# Altium PCB NCS_Wireless_Bed_Unit.PcbDoc
Units mm, origin at the board's own origin, x right, y up, seen from the top; angles counter-clockwise.
Board outline 50.04 x 65.02 mm, 2 copper layers (Top Layer, Bottom Layer), stack 1.6 mm thick; 44 components, 42 nets, 176 pads, 27 vias.
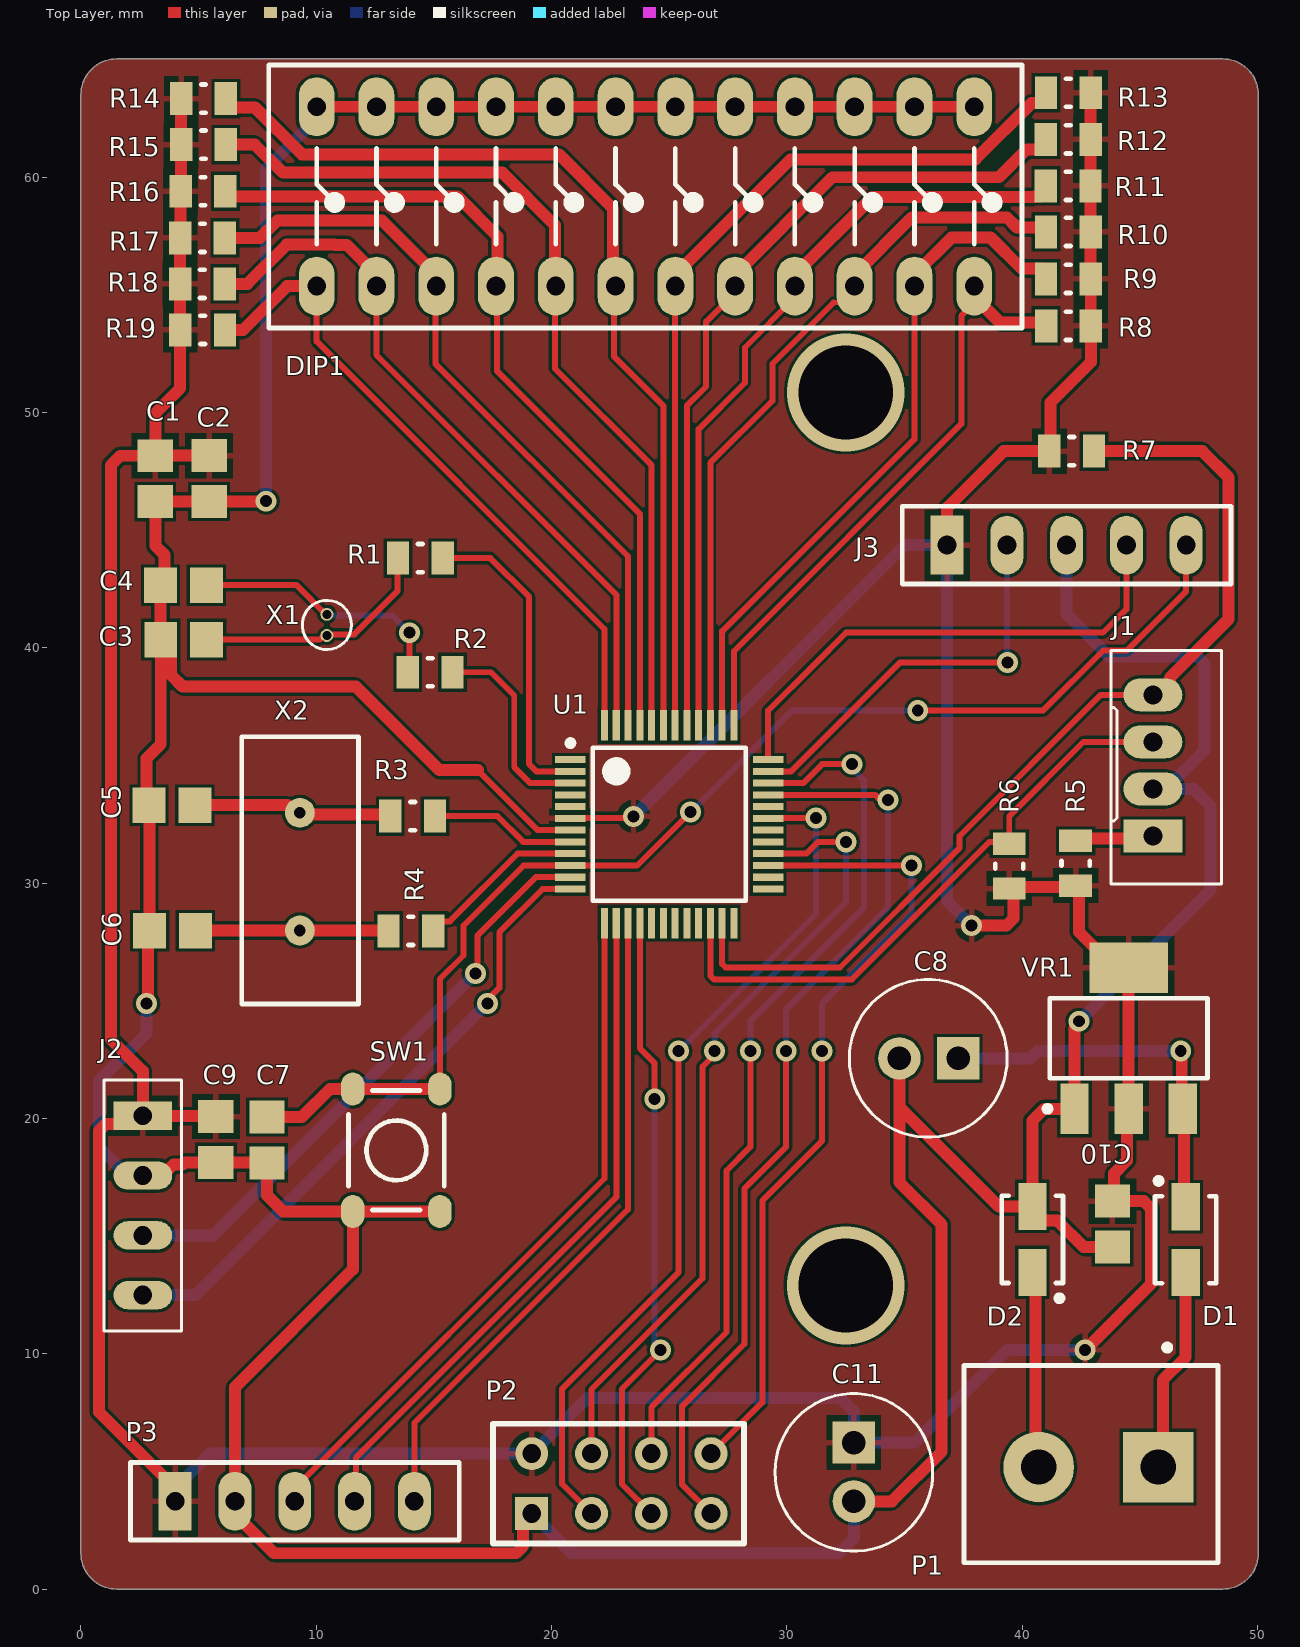
[diagram p0: Top Layer view]
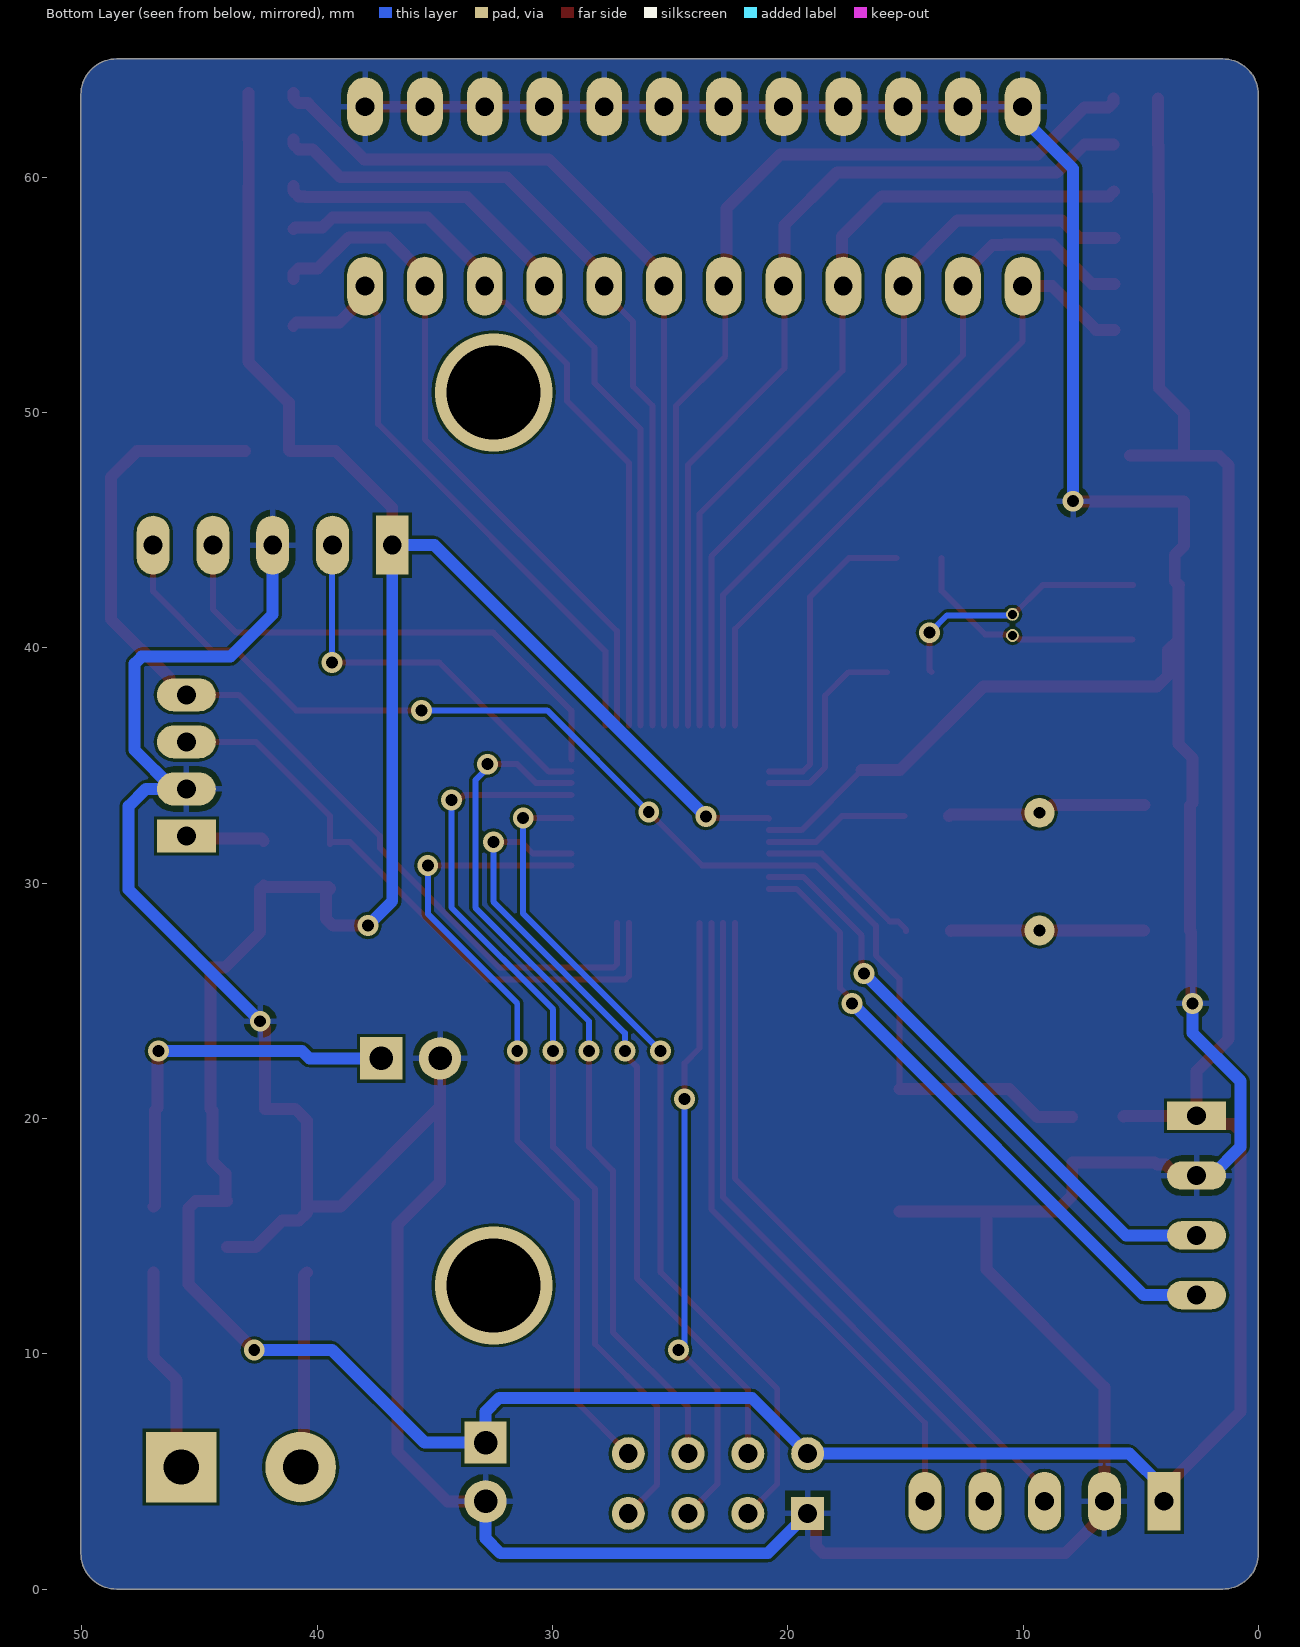
[diagram p1: Bottom Layer view, seen from below]
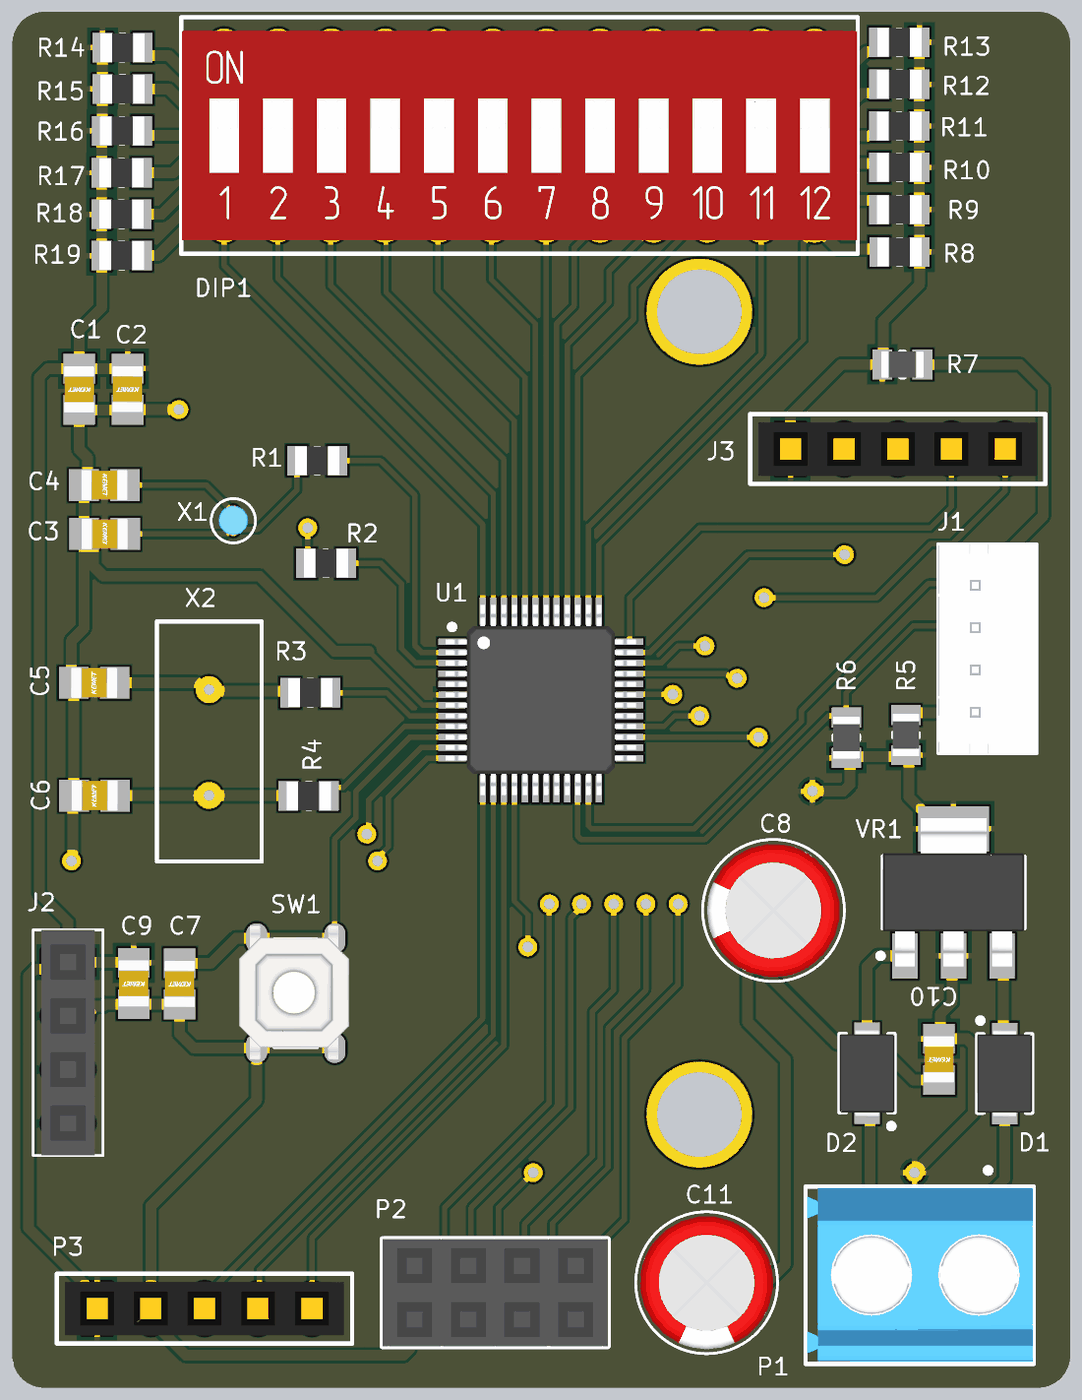
[diagram p2: 3D render of the assembled board from above, using the file's embedded part models]

## Layer stack, top to bottom
Top Solder: solder mask 0.0203, Solder Resist, Dk 3.5
Top Layer: signal copper 0.0508
Dielectric 1: dielectric 1.4986, FR-4, Dk 4.8
Bottom Layer: signal copper 0.0508
Bottom Solder: solder mask 0.0203, Solder Resist, Dk 3.5

## Board outline
1.524,0 cw(c1.524,1.524) 0,1.524 0,63.5 cw(c1.524,63.5) 1.524,65.024 48.514,65.024 cw(c48.514,63.5) 50.038,63.5 50.038,1.524 cw(c48.514,1.524) 48.514,0

## Design rules (kind name [scope] priority, off if disabled: settings)
Clearance [All] p1: gap=0.127 ignorepadtopadclearanceinfootprint=FALSE
HoleSize [All] p1: absolutevalues=TRUE maxlimit=100 minlimit=0.025 maxpercent=80.000 minpercent=20.000
MinimumSolderMaskSliver [All] p1: minsoldermaskwidth=0.127
PolygonConnect [All] p1: connectstyle=Relief reliefconductorwidth=0.254 reliefentries=4 polygonreliefangle="90 Angle" airgapwidth=0.254
RoutingVias [All] p1: holewidth=0.508 width=0.889 viastyle="Through Hole" minholewidth=0.508 minwidth=0.889 maxholewidth=100 maxwidth=100
SilkToSolderMaskClearance [IsPad] p1: minsilkscreentomaskgap=0.076 clearancetoexposedcopper=TRUE
SolderMaskExpansion [All] p1: expansion=0.102 istentingtop=FALSE
Width [All] p1: maxlimit=0.508 minlimit=0.203 preferedwidth=0.254
27 further rules are at their usual default settings.

## Classes and differential pairs
component class NCS_Wireless_Bed_Unit_Power_Supply: C8 C9 C10 C11 D1 D2 J2 P1 P2 VR1
component class NCS_Wireless_Bed_Unit_mcu: C1 C2 C3 C4 C5 C6 C7 J1 R1 R2 R3 R4 R5 R6 R7 SW1 U1 X1 X2
component class NCS_Wireless_Bed_Unit_DIP_Conn_Prog_conn: DIP1 J3 P3 R8 R9 R10 R11 R12 R13 R14 R15 R16 R17 R18 R19

## Components (designator, comment, footprint, x,y, rotation, side; value= is the part's Value field where it differs from the comment)
C1 "4.7uF" C0805C209D3HACTU_2pF 3.162,47.186 r90 top
C2 "100nF" C0805C104K3RACTU_100nF 5.448,47.191 r90 top
C3 "22pF" C0805C209D3HACTU_2pF 4.369,40.348 r180 top
C4 "22pF" C0805C209D3HACTU_2pF 4.356,42.659 r180 top
C5 "22pF" C0805C209D3HACTU_2pF 3.869,33.312 r0 top
C6 "22pF" C0805C209D3HACTU_2pF 3.892,27.978 r0 top
C7 "100nF" C0805C104K3RACTU_100nF 7.912,19.085 r90 top
C8 "100uF 25V TH" "100uF 25V TH" 37.277,22.554 r180 top
C9 "4.7uF" C0805C209D3HACTU_2pF 5.736,19.106 r90 top
C10 "104pF" C0805C471K3RACTU_470pF 43.836,15.513 r90 top
C11 "100uF 25V TH" "100uF 25V TH" 32.844,6.228 r270 top
D1 "Diode" CRS06(TE85L,Q,M)_DIODE 46.944,14.847 r90 top
D2 "Diode" CRS06(TE85L,Q,M)_DIODE 40.432,14.86 r270 top
DIP1 "12 DIP" DIP24 37.96,62.991 r270 top
J1 "1x4 Female Header" "1x4 Female Socket" 45.554,32.001 r180 top
J2 "1x4 Female Header" "1x4 Female Header" 2.631,20.112 r0 top
J3 "1x5 Female Header" "1x5 Female Header" 36.809,44.363 r90 top (schematic designator j3)
P1 "1x2 Connector" "1x2 Connector" 43.239,5.185 r270 top
P2 "2x4 header" "2x4 header" 19.157,3.216 r90 top
P3 "1x5 Female Header" "1x5 Female Header" 4.008,3.733 r90 top
R1 "0R" RC0805JR-070RL 14.423,43.812 r0 top value=0mR
R2 "0R" RC0805JR-070RL 14.838,38.96 r0 top value=0mR
R3 "0R" RC0805JR-070RL 14.096,32.845 r180 top value=0mR
R4 "0R" RC0805JR-070RL 14.019,27.969 r180 top value=0mR
R5 "1K" AC0805FR-7W1KL 42.269,30.844 r90 top value=1kR
R6 "1K" AC0805FR-7W1KL 39.449,30.72 r90 top value=1kR
R7 "1K" AC0805FR-7W1KL 42.103,48.358 r0 top value=1kR
R8 "4K7" RC0805FR-7W4K7L 41.965,53.681 r180 top
R9 "4K7" RC0805FR-7W4K7L 41.96,55.676 r180 top
R10 "4K7" RC0805FR-7W4K7L 41.96,57.676 r180 top
R11 "4K7" RC0805FR-7W4K7L 41.955,59.629 r180 top
R12 "4K7" RC0805FR-7W4K7L 41.958,61.606 r180 top
R13 "4K7" RC0805FR-7W4K7L 41.962,63.587 r180 top
R14 "4K7" RC0805FR-7W4K7L 5.21,63.337 r0 top
R15 "4K7" RC0805FR-7W4K7L 5.208,61.381 r0 top
R16 "4K7" RC0805FR-7W4K7L 5.188,59.4 r0 top
R17 "4K7" RC0805FR-7W4K7L 5.168,57.419 r0 top
R18 "4K7" RC0805FR-7W4K7L 5.165,55.463 r0 top
R19 "4K7" RC0805FR-7W4K7L 5.17,53.507 r0 top
SW1 "Push Button" "PUSH BUTTON SMD" 13.406,18.646 r90 top
U1 "STM32C031C6T6" STM32C031C6T6-48N 25,32.5 r0 top
VR1 "3v3 Voltage R" SAMS1117-33-4N 44.525,23.408 r90 top
X1 "32.768Khz" 32.768KHz 10.452,41.373 r270 top
X2 "8Mhz" "8Mhz Crystal" 9.304,27.989 r90 top

## Footprints (in the part's own frame and the unit in brackets; to place one, negate y for a bottom-side part, rotate by r counter-clockwise, add the part's x,y. Pads: shape width x height; smd on the part's side, far side on the other; paste and mask are expansions set on the pad)
"1x2 Connector" [mm]
  rect 3x3 hole 1.5: 1(0,2.54)
  round 3 hole 1.5: 2(0,-2.54)
  silkscreen extent -5.21,-5.72 4.06,5.08, body extent -4.24,-5.63 3.96,5.03, height 10
"1x4 Female Header" [mm]
  rect 2.5x1.2 hole 0.8: 1(0,0)
  oval 2.5x1.2 hole 0.8: 2(0,-2.54) 3(0,-5.08) 4(0,-7.62)
  silkscreen extent -1.65,-9.14 1.65,1.52, body extent -1.27,-9.14 1.27,1.52, height 8.51
"1x4 Female Socket" [mm]
  rect 2.5x1.4 hole 0.8: 1(0,0)
  oval 2.5x1.4 hole 0.8: 2(0,-2) 3(0,-4) 4(0,-6)
  silkscreen extent -2.92,-7.87 1.78,2.03, body extent -2.9,-7.87 1.75,2.03, height 6
"1x5 Female Header" [mm]
  rect 2.5x1.4 hole 0.8: 1(0,0)
  oval 2.5x1.4 hole 0.8: 2(0,-2.54) 3(0,-5.08) 4(0,-7.62) 5(0,-10.16)
  silkscreen extent -1.65,-12.06 1.65,1.91, body extent -1.27,-11.68 1.27,1.52, height 8.5
"2x4 header" [mm]
  rect 1.4x1.4 hole 0.8: 1(0,0)
  round 1.4 hole 0.8: 2(2.54,0) 3(0,-2.54) 4(2.54,-2.54) 5(0,-5.08) 6(2.54,-5.08) 7(0,-7.62) 8(2.54,-7.62)
  silkscreen extent -1.27,-9.02 3.81,1.65, body extent -1.27,-9.02 3.81,1.65, height 8.51
"8Mhz Crystal" [mm]
  round 1.27 hole 0.5: 1(0,0) 2(5,0)
  silkscreen extent -3.12,-2.49 8.23,2.46, body extent -3.13,-2.5 8.22,2.5, height 3.68
32.768KHz [mm]
  round 0.55 hole 0.38: 1(-0.051,0) 2(0.851,0)
  silkscreen extent -0.65,-1.04 1.45,1.05, body extent -0.32,-0.7 1.08,0.7, height 5
"100uF 25V TH" [mm]
  rect 1.8x1.8 hole 1: 1(0,0)
  round 1.8 hole 1: 2(2.5,0)
  silkscreen extent -2.08,-3.35 4.62,3.35, body extent -1.88,-3.15 4.41,3.15, height 10.89
AC0805FR-7W1KL [mm]
  rect 0.95x1.4 smd: 1(-0.95,0) 2(0.95,0)
  silkscreen extent -0.1,-0.6 0.1,0.6, body extent -1,-0.63 1,0.63, height 0.6
C0805C104K3RACTU_100nF [mm]
  rect 1.4x1.5 smd: 1(-0.975,0) 2(0.975,0)
  body extent -1.1,-0.72 1.1,0.73, height 0.88
C0805C209D3HACTU_2pF [mm] "Chip Capacitor, 2-Leads, Body 2.50x1.35mm, IPC Medium Density"
  rect 1.4x1.5 smd: 1(-0.975,0) 2(0.975,0)
  body extent -1.1,-0.72 1.1,0.73, height 0.88
C0805C471K3RACTU_470pF [mm] "Chip Capacitor, 2-Leads, Body 2.50x1.35mm, IPC Medium Density"
  rect 1.4x1.5 smd: 1(-0.975,0) 2(0.975,0)
  body extent -1.1,-0.72 1.1,0.73, height 0.88
CRS06(TE85L,Q,M)_DIODE [mm] "Molded Diode, 2-Leads, Body 3.60x2.30mm, IPC Medium Density"
  rect 2x1.2 smd: 1(-1.4,0) 2(1.4,0)
  silkscreen extent -1.85,-1.3 2.62,1.3, body extent -2.07,-1.3 2.07,1.3, height 1.5
DIP24 [mm]
  oval 2.5x1.524 hole 0.8: 1(0,0) 2(0,-2.54) 3(0,-5.08) 4(0,-7.62) 5(0,-10.16) 6(0,-12.7) 7(0,-15.24) 8(0,-17.78) 9(0,-20.32) 10(0,-22.86) 11(0,-25.4) 12(0,-27.94) 13(7.62,-27.94) 14(7.62,-25.4) 15(7.62,-22.86) 16(7.62,-20.32) 17(7.62,-17.78) 18(7.62,-15.24) 19(7.62,-12.7) 20(7.62,-10.16) 21(7.62,-7.62) 22(7.62,-5.08) 23(7.62,-2.54) 24(7.62,0)
  silkscreen extent -1.78,-29.97 9.4,2.03, body extent -1.14,-29.94 8.76,2, height 6.8
"PUSH BUTTON SMD" [mm]
  oval 1.4x1 smd: 1(-2.6,1.85) 2(-2.6,-1.85) 3(2.6,-1.85) 4(2.6,1.85)
  silkscreen extent -2.54,-2.03 2.54,2.03, body extent -3.17,-2.52 3.23,2.68, height 3
RC0805FR-7W4K7L [mm]
  rect 0.95x1.4 smd: 1(-0.95,0) 2(0.95,0)
  silkscreen extent -0.1,-0.6 0.1,0.6, body extent -1.05,-0.67 1.05,0.67, height 0.6
RC0805JR-070RL [mm]
  rect 0.95x1.4 smd: 1(-0.95,0) 2(0.95,0)
  silkscreen extent -0.1,-0.6 0.1,0.6, body extent -1.05,-0.67 1.05,0.67, height 0.6
SAMS1117-33-4N [mm] "SOT223, 4-Leads, Body 6.50x7.00mm (avg), Pitch 2.30mm, IPC Medium Density"
  rect 2.15x1.2 smd: 1(-3,2.3) 2(-3,0) 3(-3,-2.3)
  rect 2.15x3.35 smd: 4(3,0)
  silkscreen extent -3.12,-3.35 1.7,3.57, body extent -3.5,-3.35 3.5,3.35, height 1.8
STM32C031C6T6-48N [mm] "TSQFP, 48-Leads, Body 7.30x7.30mm, Pitch 0.50mm, IPC Medium Density"
  rect 1.3x0.3 smd: 1(-4.2,2.75) 2(-4.2,2.25) 3(-4.2,1.75) 4(-4.2,1.25) 5(-4.2,0.75) 6(-4.2,0.25) 7(-4.2,-0.25) 8(-4.2,-0.75) 9(-4.2,-1.25) 10(-4.2,-1.75) 11(-4.2,-2.25) 12(-4.2,-2.75) 25(4.2,-2.75) 26(4.2,-2.25) 27(4.2,-1.75) 28(4.2,-1.25) 29(4.2,-0.75) 30(4.2,-0.25) 31(4.2,0.25) 32(4.2,0.75) 33(4.2,1.25) 34(4.2,1.75) 35(4.2,2.25) 36(4.2,2.75)
  rect 0.3x1.3 smd: 13(-2.75,-4.2) 14(-2.25,-4.2) 15(-1.75,-4.2) 16(-1.25,-4.2) 17(-0.75,-4.2) 18(-0.25,-4.2) 19(0.25,-4.2) 20(0.75,-4.2) 21(1.25,-4.2) 22(1.75,-4.2) 23(2.25,-4.2) 24(2.75,-4.2) 37(2.75,4.2) 38(2.25,4.2) 39(1.75,4.2) 40(1.25,4.2) 41(0.75,4.2) 42(0.25,4.2) 43(-0.25,4.2) 44(-0.75,4.2) 45(-1.25,4.2) 46(-1.75,4.2) 47(-2.25,4.2) 48(-2.75,4.2)
  silkscreen extent -4.32,-3.25 3.25,3.57, body extent -4.5,-4.5 4.5,4.5, height 1.6

## Part data
C1 C9: library part C0805C475K3PACTU, "Multilayer Ceramic Capacitor, 4.7 uF, 25 V, ï¿½ 10%, X5R, 0805 [2012 Metric]", Case Code (Imperial)=0805, Case Code (Metric)=2012, Dielectric=X5R, Manufacturer=KEMET, Max Operating Temperature=85°C, Min Operating Temperature=-55°C, Package Quantity=2500, Supplier Part Number=80-C0805C475K3P, Tolerance=10%, Voltage Rating (DC)=25V, Case/Package=0805, Category="Ceramic Capacitors", ComponentLink1Description=https://datasheet.ciiva.com/22748/1918694-22748309.pdf?src-supplier=Element14, ComponentLink1URL=https://datasheet.ciiva.com/22748/1918694-22748309.pdf?src-supplier=Element14, ComponentLink2Description=https://datasheet.ciiva.com/18193/getdatasheetpartid-195812-18193898.pdf?src-supplier=Verical, ComponentLink2URL=https://datasheet.ciiva.com/18193/getdatasheetpartid-195812-18193898.pdf?src-supplier=Verical, ComponentLink3Description=https://datasheet.ciiva.com/18193/getdatasheetpartid-385757-18193895.pdf?src-supplier=Verical, ComponentLink3URL=https://datasheet.ciiva.com/18193/getdatasheetpartid-385757-18193895.pdf?src-supplier=Verical, Construction=Flat, Depth=1.25mm, Dissipation Factor=5%, Height=1.25mm, Length=2mm, Manufacturer Part Number=C0805C475K3PACTU, Material=4241ConductorMaterial, Mounting Technology="Surface Mount,PCB", Packaging="Tape and Reel", Pins=2NUMBER, Pricing="1=0.28, 10=0.131, 50=0.131, 100=0.086, 1000=0.071, 10000=0.045 (USD)", Radiation Hardening=No, Reach SVHC Compliant=No, RoHS=Yes, RoHS Compliant=Yes, Series="SMD Comm X5R", Stock=222120, Supplier=Mouser, Termination=SMD/SMT, Thickness=1.397mm, Width=1.2mm
C2 C7: library part C0805C104K3RACTU, "Multilayer Ceramic Capacitor, 0.1 uF, 25 V, ï¿½ 10%, X7R, 0805 [2012 Metric]", Case Code (Imperial)=0805, Case Code (Metric)=2012, Dielectric=X7R, Manufacturer=KEMET, Max Operating Temperature=125°C, Min Operating Temperature=-55°C, Package Quantity=4000, Supplier Part Number=80-C0805C104K3R, Temperature Coefficient=30ppm/°C, Tolerance=10%, Voltage Rating=25V, Case/Package=0805, Category="Ceramic Capacitors", ComponentLink1Description=https://datasheet.ciiva.com/7842/kem-c1002-x7r-smd-7842536.pdf?src-supplier=Element14, ComponentLink1URL=https://datasheet.ciiva.com/7842/kem-c1002-x7r-smd-7842536.pdf?src-supplier=Element14, ComponentLink2Description=https://datasheet.ciiva.com/7842/kem-c1002-x7r-smd-7842538.pdf?src-supplier=Element14, ComponentLink2URL=https://datasheet.ciiva.com/7842/kem-c1002-x7r-smd-7842538.pdf?src-supplier=Element14, Construction=Flat, Depth=1.25mm, Height=0.9mm, Lead Free=5697LeadFree, Lead Pitch=0.75mm, Length=2mm, Manufacturer Part Number=C0805C104K3RACTU, Material=4241ConductorMaterial, Mounting Technology="Surface Mount,PCB", Packaging="Tape and Reel", Pins=2NUMBER, Pricing="1=0.1, 10=0.03, 50=0.03, 100=0.027, 1000=0.021, 10000=0.015 (USD)", Radiation Hardening=No, Reach SVHC Compliant=4186SVHC, RoHS=Yes, RoHS Compliant=Yes, Series="SMD Comm X7R", Stock=259681, Supplier=Mouser, Termination=SMD/SMT, Thickness=889um, Voltage Rating (DC)=25V, Width=1.2mm
C3 C4 C5 C6: library part C0805C209D3HACTU, "C0805C209D3HACTU_2pF", Manufacturer=KEMET, Supplier Part Number=80-C0805C209D3HACTU, Category=Capacitors, Manufacturer Part Number=C0805C209D3HACTU, Pricing="1=0.1, 10=0.032, 50=0.032, 100=0.02, 1000=0.015, 10000=0.01 (USD)", RoHS=Yes, RoHS Compliant=Yes, Stock=22626, Supplier=Mouser
C8 C11: library part 860010473007, "WCAP-ATG8 Aluminum Electrolytic Capacitors", Leakage Current=25uA, Manufacturer="Wurth Electronics", Supplier Part Number 1=732-8630-1-ND, Voltage Rating (DC)=25V, Category="Aluminum Electrolytic Capacitors", ComponentLink1Description=https://datasheet.ciiva.com/48693/001280151-da-01-en-wcap-atg8-alu-elec-caps-860010473007-48693591.pdf?src-supplier=Conrad, ComponentLink1URL=https://datasheet.ciiva.com/48693/001280151-da-01-en-wcap-atg8-alu-elec-caps-860010473007-48693591.pdf?src-supplier=Conrad, Length=11mm, Manufacturer Part Number=860010473007, Pitch=2.5mm, Pricing 1="1=0.12, 50=0.1, 100=0.0873, 250=0.07832, 500=0.0675 (USD)", RoHS=Yes, Stock 1=10593, Supplier 1=Digikey
C10: library part C0805C471K3RACTU, "Capacitor, Ceramic, 470pF, 25VDC, 10-% Tol, 10+% Tol, X7R-TC Code, -15, 15%-TC RoHS Compliant: Yes", Manufacturer=KEMET, Supplier Part Number=80-C0805C471K3R, Category="Ceramic Capacitors", ComponentLink1Description=http://www.mouser.com/ds/2/212/KEM_C1002_X7R_SMD-1102033.pdf?src-supplier=Mouser, ComponentLink1URL=http://www.mouser.com/ds/2/212/KEM_C1002_X7R_SMD-1102033.pdf?src-supplier=Mouser, ComponentLink2Description=http://components.arrow.com/part/dataview/3447639S9184872N7429?src-supplier=Arrow+Electronics, ComponentLink2URL=http://components.arrow.com/part/dataview/3447639S9184872N7429?src-supplier=Arrow+Electronics, ComponentLink3Description=http://www.kemet.com/docfinder?Partnumber=C0805C471K3RACTU&src-supplier=Digikey, ComponentLink3URL=http://www.kemet.com/docfinder?Partnumber=C0805C471K3RACTU&src-supplier=Digikey, Manufacturer Part Number=C0805C471K3RACTU, Pricing="1=0.28, 10=0.127, 50=0.127, 100=0.076, 1000=0.064, 10000=0.05 (USD)", RoHS=Yes, Stock=4230, Supplier=Mouser
D1 D2: library part CRS06(TE85L,Q,M), "Diode Schottky 20V 1A 2-Pin S-FLAT T/R / DIODE SCHOTTKY 20V 1A SFLAT", Manufacturer=Toshiba, Supplier Part Number=CRS06QMCT-ND, Category="Rectifier Diodes", ComponentLink1Description=https://datasheet.ciiva.com/887/1764-887142.pdf?src-supplier=Digikey, ComponentLink1URL=https://datasheet.ciiva.com/887/1764-887142.pdf?src-supplier=Digikey, ComponentLink2Description=https://datasheet.ciiva.com/26868/getdatasheetpartid-564949-26868437.pdf?src-supplier=Verical, ComponentLink2URL=https://datasheet.ciiva.com/26868/getdatasheetpartid-564949-26868437.pdf?src-supplier=Verical, ComponentLink3Description=https://datasheet.ciiva.com/4715/1638-15026-4715604.pdf?src-supplier=Mouser, ComponentLink3URL=https://datasheet.ciiva.com/4715/1638-15026-4715604.pdf?src-supplier=Mouser, ComponentLink4Description=https://datasheet.ciiva.com/8290/crs06-datasheet-en-20131101-8290709.pdf?src-supplier=Avnet, ComponentLink4URL=https://datasheet.ciiva.com/8290/crs06-datasheet-en-20131101-8290709.pdf?src-supplier=Avnet, ComponentLink5Description=https://datasheet.ciiva.com/916/dst-crs06-tde-en-1638-916705.pdf?src-supplier=Digikey, ComponentLink5URL=https://datasheet.ciiva.com/916/dst-crs06-tde-en-1638-916705.pdf?src-supplier=Digikey, Manufacturer Part Number=CRS06(TE85L,Q,M), Pricing="1=0.41, 10=0.32, 100=0.2283, 500=0.17242, 1000=0.15438 (USD)", RoHS=Yes, Stock=4733, Supplier=Digikey
DIP1: library part "12 Way 2.54MM DIP switch - SUNROM"
J1: library part SWR201-NRTN-S04-SA-WH, "Wafer: , Tin Overall, Straight w/ Type 1 Kinked End Pins, 1x4 Pos (4 pins)", Flammability Rating="UL94 V-0", Insulation Color=White, Manufacturer=Sullins, Max Operating Temperature=85°C, Min Operating Temperature=-25°C, Supplier Part Number 1=S9457-ND, Voltage Rating=125V, Category=Connectors, ComponentLink1Description=https://datasheet.ciiva.com/740/swr201-nrtn-sxx-sa-wh-740672.pdf?src-supplier=Digikey, ComponentLink1URL=https://datasheet.ciiva.com/740/swr201-nrtn-sxx-sa-wh-740672.pdf?src-supplier=Digikey, ComponentLink2Description=https://datasheet.ciiva.com/16492/swr201-nrtn-sa-wh-16492299.pdf?src-supplier=Future+Electronics, ComponentLink2URL=https://datasheet.ciiva.com/16492/swr201-nrtn-sa-wh-16492299.pdf?src-supplier=Future+Electronics, Connector Type=Header, Contact Finish - Mating=TIN, Contact Material=Brass, Contact Shape=Square, Contact Type="Male Pin", Fastening Type=Detent, Insulation Material=Nylon, Lead Free="Lead Free", Manufacturer Part Number=SWR201-NRTN-S04-SA-WH, Mount="Through Hole", Number of Positions=4, Number of Rows=1, Packaging=Bulk, Pricing 1="1=0.14, 10=0.118, 100=0.1004, 500=0.08962, 2000=0.08125, 6000=0.07518, 10000=0.07252 (USD)", RoHS=Yes, RoHS Compliant=Yes, Series=SWR201, Stock 1=6908, Supplier 1=Digikey, Termination="Kinked Pin"
J2: library part PPPC041LFBN-RC, "Female, 4 C, Straight, .100\"CC; 3.20mm Tail, No Mounting; PBT, Phos. Bronze, 105 C", Manufacturer=Sullins, Supplier Part Number 1=S7037-ND, Category=Connectors, ComponentLink1Description=https://media.digikey.com/pdf/Data%20Sheets/Sullins%20PDFs/Female_Headers.100_DS.pdf?src-supplier=Digikey, ComponentLink1URL=https://media.digikey.com/pdf/Data%20Sheets/Sullins%20PDFs/Female_Headers.100_DS.pdf?src-supplier=Digikey, ComponentLink2Description=http://www.sullinscorp.com/catalogs/78_Page80-81_HEADER_.100_2.54mm_FEMALE.pdf?src-supplier=Future+Electronics, ComponentLink2URL=http://www.sullinscorp.com/catalogs/78_Page80-81_HEADER_.100_2.54mm_FEMALE.pdf?src-supplier=Future+Electronics, ComponentLink3Description=https://datasheet.octopart.com/PPPC041LFBN-RC-Sullins-datasheet-41308905.pdf?src-supplier=Future+Electronics, ComponentLink3URL=https://datasheet.octopart.com/PPPC041LFBN-RC-Sullins-datasheet-41308905.pdf?src-supplier=Future+Electronics, Contact Material=150ConductorMaterial, Height=8.5mm, Housing Material=4239ConductorMaterial, Lead Free=5697LeadFree, Length=10.7mm, Manufacturer Part Number=PPPC041LFBN-RC, Pricing 1="1=0.42, 10=0.338, 100=0.2755, 500=0.23884, 1000=0.2246, 5000=0.2106 (USD)", RoHS=Yes, Stock 1=15423, Supplier 1=Digikey, Width=2.5mm
J3 P3: library part M20-9990546, "2.54mm (0.1) Pitch SIL Vertical PC Tail Pin Header, 6.1mm mating pin height, tin, 5 contacts\"", Case/Package=SIL, Current Rating=3A, Flammability Rating="UL94 V-0", Insulation Color=Black, Insulation Resistance=10GR, Manufacturer=Harwin, Max Operating Temperature=105°C, Min Operating Temperature=-40°C, Package Quantity=1000, Supplier Part Number=952-2268-ND, Voltage Rating (DC)=750V, Category="Headers and Wire Housings", ComponentLink1Description=https://datasheet.ciiva.com/11749/0900766b80da602d-11749062.pdf?src-supplier=Rs, ComponentLink1URL=https://datasheet.ciiva.com/11749/0900766b80da602d-11749062.pdf?src-supplier=Rs, ComponentLink2Description=https://datasheet.ciiva.com/6833/m20-999-6833320.pdf?src-supplier=Digikey, ComponentLink2URL=https://datasheet.ciiva.com/6833/m20-999-6833320.pdf?src-supplier=Digikey, ComponentLink3Description=https://datasheet.ciiva.com/8046/315376-8046940.pdf?src-supplier=Element14, ComponentLink3URL=https://datasheet.ciiva.com/8046/315376-8046940.pdf?src-supplier=Element14, Contact Finish - Mating=TIN, Contact Material=Brass,Bronze, Contact Plating=Tin, Contact Shape=Square, Contact Type="Male Pin", Fastening Type=Pull, Gender=Male, Insulation Material=Nylon, Manufacturer Part Number=M20-9990546, Mated Stacking Heights=16.54mm, Mounting Technology="Through Hole", Number of Contacts=5, Number of Positions=5, Number of Rows=1, Orientation=Straight, Packaging=Bulk, Pitch=2.54mm, Pricing="1=0.2, 10=0.163, 100=0.1329, 500=0.11516, 1000=0.10828, 5000=0.09388, 10000=0.08828 (USD)", Reach SVHC Compliant=No, RoHS=Yes, RoHS Compliant=Yes, Series=M20, Stock=16218, Supplier=Digikey, Termination=Solder
P1: library part TB006-508-02BE, "2~24 Poles, Screw Type, Horizontal, 5.08 Pitch, 26~14 (AWG), Terminal Block Connector", Manufacturer=CUI, Supplier Part Number=9117522, Manufacturer Part Number=TB006-508-02BE, RoHS=Yes, Supplier="Future Electronics"
P2: library part PPTC042LFBN-RC, "Header Connector, Pcb Mnt, 8 Contacts, Skt, 0.1 Pitch, Pc Tail Terminal, Locking", Current Rating=3A, Manufacturer=Sullins, Supplier Part Number=S7072-ND, Category="Headers and Wire Housings", ComponentLink1Description=https://media.digikey.com/pdf/Data%20Sheets/Sullins%20PDFs/Female_Headers.100_DS.pdf?src-supplier=Digikey, ComponentLink1URL=https://media.digikey.com/pdf/Data%20Sheets/Sullins%20PDFs/Female_Headers.100_DS.pdf?src-supplier=Digikey, ComponentLink2Description=https://datasheet.octopart.com/PPTC042LFBN-RC-Sullins-datasheet-83216130.pdf?src-supplier=Future+Electronics, ComponentLink2URL=https://datasheet.octopart.com/PPTC042LFBN-RC-Sullins-datasheet-83216130.pdf?src-supplier=Future+Electronics, Contact Material=150,153,154ConductorMaterial, Height=8.5mm, Housing Material=4239ConductorMaterial, Lead Free=5697LeadFree, Length=10.7mm, Manufacturer Part Number=PPTC042LFBN-RC, Number of Contacts=8NUMBER, Pricing="1=0.63, 10=0.514, 80=0.427, 440=0.36705, 1000=0.34128, 5000=0.3328 (USD)", RoHS=Yes, Stock=8036, Supplier=Digikey, Width=5mm
R1 R2 R3 R4: library part RC0805JR-070RL, "GENERAL PURPOSE CHIP RESISTOR Metal Glaze/thick Film, 0.125W, 0ohm, Surface Mount, 0805", Case Code (Imperial)=0805, Case Code (Metric)=2012, Manufacturer=Yageo, Max Operating Temperature=155°C, Max Power Dissipation=125mW, Min Operating Temperature=-55°C, Resistance Tolerance=5%, Resistor Type="Thick Film", Supplier Part Number=2506467, Temperature Coefficient=200ppm/°C, Voltage Rating=150V, Case/Package=0805, Category="Chip SMD Resistors", ComponentLink1Description=https://datasheet.ciiva.com/11819/0900766b8106beab-11819430.pdf?src-supplier=Rs, ComponentLink1URL=https://datasheet.ciiva.com/11819/0900766b8106beab-11819430.pdf?src-supplier=Rs, ComponentLink2Description=https://datasheet.ciiva.com/7941/1738694-7941861.pdf?src-supplier=Element14, ComponentLink2URL=https://datasheet.ciiva.com/7941/1738694-7941861.pdf?src-supplier=Element14, ComponentLink3Description=https://datasheet.ciiva.com/7941/1738694-7941862.pdf?src-supplier=Element14, ComponentLink3URL=https://datasheet.ciiva.com/7941/1738694-7941862.pdf?src-supplier=Element14, ComponentLink4Description=https://datasheet.ciiva.com/7941/1738694-7941863.pdf?src-supplier=Element14, ComponentLink4URL=https://datasheet.ciiva.com/7941/1738694-7941863.pdf?src-supplier=Element14, ComponentLink5Description=https://datasheet.ciiva.com/15190/getdatasheetpartid-330685-15190028.pdf?src-supplier=Verical, ComponentLink5URL=https://datasheet.ciiva.com/15190/getdatasheetpartid-330685-15190028.pdf?src-supplier=Verical, Construction=Rectangular, Contact Plating=Tin,Matte, Depth=1.25mm, Features="Moisture Resistant", Height=0.5mm, Lead Free=5697LeadFree, Length=2mm, Manufacturer Part Number=RC0805JR-070RL, Military Standard=Not, Number of Terminations=2, Packaging="Tape and Reel", Pins=2, Power Rating=125mW, Pricing="5000=0.0014, 25000=0.0013, 100000=0.0013, 125000=0.0013, 250000=0.0012, 500000=0.0012, 625000=0.0012, 1250000=0.0012 (USD)", Reach SVHC Compliant=Unknown, RoHS=Yes, RoHS Compliant=Yes, Series=RC, Stock=435000, Supplier="Future Electronics", Technology="THICK FILM", Termination=SMD/SMT, Tolerance=5%, Voltage Rating (DC)=150V, Width=1.25mm
R5 R6 R7: library part AC0805FR-7W1KL, "SMD Chip Resistor, 1 kOhm, ± 1%, 250 mW, 0805 [2012 Metric], Thick Film, General Purpose", Case/Package=339Case, Manufacturer=Yageo, Supplier Part Number=13-AC0805FR-7W1KLCT-ND, Category="Chip SMD Resistors", Manufacturer Part Number=AC0805FR-7W1KL, Packaging=10Packaging, Pricing="1=0.1, 10=0.027, 50=0.0204, 100=0.0143, 500=0.01378, 1000=0.01326 (USD)", RoHS=Yes, RoHS Compliant=Yes, Stock=36869, Supplier=Digikey
R8 R9 R10 R11 R12 R13 R14 R15 R16 R17 R18 R19: library part RC0805FR-7W4K7L, "SMD Chip Resistor, 4.7 kOhm, ± 1%, 250 mW, 0805 [2012 Metric], Thick Film, General Purpose", Manufacturer=Yageo, Supplier Part Number=13-RC0805FR-7W4K7LCT-ND, Category="Chip SMD Resistors", Manufacturer Part Number=RC0805FR-7W4K7L, Pricing="1=0.17, 10=0.06, 50=0.0484, 100=0.0367, 500=0.03468, 1000=0.03264 (USD)", RoHS=Yes, RoHS Compliant=Yes, Stock=8233, Supplier=Digikey
SW1: library part "Tactile Switch SMD 4P 5.2x5.2x1.5mm - EVELTA"
U1: "RISC Microcontroller, 32-Bit, FLASH, CORTEX-M4F CPU, 180MHz, CMOS, PBGA216", Manufacturer=STMicroelectronics, Supplier Part Number 1=511-STM32C031C6T6, Category=Microcontrollers, ComponentLink1Description=https://datasheet.octopart.com/STM32C031C6T6-STMicroelectronics-datasheet-168218616.pdf?src-supplier=TME, ComponentLink1URL=https://datasheet.octopart.com/STM32C031C6T6-STMicroelectronics-datasheet-168218616.pdf?src-supplier=TME, Manufacturer Part Number=STM32C031C6T6, Pricing 1="1=2.39, 10=1.53, 50=1.36, 100=1.12, 1000=0.78, 10000=0.629 (USD)", RoHS=No, Stock 1=900, Supplier 1=Mouser
VR1: library part AMS1117-33-3.3V
X1: library part "32.768 Khz RTC Crystal T38-SUNROM"
X2: library part "8 Mhz Crystal HC-49US-SUNROM"

## Via types
v1: diameter 0.889, hole 0.508, Top Layer to Bottom Layer, 25 vias
v2: diameter 5, hole 4, Top Layer to Bottom Layer, 2 vias

## Nets (pads, with @x,y where several pads share a name; then routed paths per layer and width w, separated by ;. In a path a pad name is that pad's centre, name@x,y a point inside that pad or via, vN(x,y) a via of type N, cw(c..) or ccw(c..) an arc to the next point about the centre after c; other vN are vias at no path point)
+9V: D1.1 P1.1 | length 8.7
  Top Layer w0.508: P1.1 45.974,5.38 45.974,8.89 46.944,9.86 D1.1
AGND: D2.2 P1.2 | length 8.4
  Top Layer w0.508: D2.2 40.565,13.326 40.565,5.319 P1.2
GND: C1.1 C2.1 C3.2 C4.2 C5.1 C6.1 C7.1 C8.2 C9.1 C10.1 C11.2 D2.1 DIP1.1 DIP1.2 DIP1.3 DIP1.4 DIP1.5 DIP1.6 DIP1.7 DIP1.8 DIP1.9 DIP1.10 DIP1.11 DIP1.12 J1.2 J2.2 J3.3 P2.1 P3.2 SW1.1 SW1.2 U1.7 VR1.1 | length 235.9
  Top Layer w0.254: 16.866,34.798 19.414,32.25 U1.7
  Top Layer w0.508: J2.2 3.468,17.572 3.93,18.034 4.318,18.034 4.415,18.131 C9.1 5.746,18.121 7.902,18.121 C7.1 7.912,16.726 8.592,16.046 SW1.1 ; v1(2.794,24.892) 2.856,24.954 2.856,27.917 C6.1 2.906,27.99 2.906,33.301 C5.1 2.794,33.413 2.794,35.306 3.394,35.906 C3.2 ; v1(7.874,46.228) 7.868,46.222 5.454,46.222 C2.1 5.445,46.213 3.165,46.213 C1.1 3.162,44.336 3.556,43.942 3.556,42.834 C4.2 3.388,42.653 3.388,40.354 C3.2 ; DIP1.12 DIP1.11 DIP1.10 DIP1.9 DIP1.8 DIP1.7 DIP1.6 DIP1.5 DIP1.4 DIP1.3 DIP1.2 DIP1.1 ; SW1.2 SW1.1 ; 16.866,34.798 15.24,34.798 11.684,38.354 4.318,38.354 3.836,38.836 3.836,39.905 C3.2 ; P2.1 18.796,2.855 18.796,1.822 18.498,1.524 8.207,1.524 6.548,3.183 P3.2 6.548,8.58 11.556,13.588 SW1.1 ; C11.2 34.462,3.728 36.576,5.842 36.576,15.494 34.777,17.293 34.777,20.486 ; C8.2 34.777,20.486 ; v1@42.225,23.834 VR1.1 40.938,20.408 40.432,19.902 D2.1 ; C10.1 42.612,14.538 41.492,15.658 40.778,15.658 40.432,16.004 D2.1 ; 34.777,20.486 39.003,16.26 D2.1
  Bottom Layer w0.508: J2.2 1.981,17.572 0.762,18.79 0.762,21.59 2.794,23.622 v1(2.794,24.892) ; v1(7.874,46.228) 7.874,60.357 10.02,62.503 DIP1.12 ; P2.1 20.849,1.524 32.214,1.524 32.844,2.153 C11.2 ; J3.3 41.889,41.423 43.688,39.624 47.454,39.624 47.752,39.326 47.752,35.649 J1.2@46.104,34.001 ; v1(42.418,24.13) 48.006,29.718 48.006,33.274 47.279,34.001 J1.2@46.104,34.001 ; J1.2 J1.2@46.104,34.001
NetC3_1: C3.1 R1.1 X1.2 | length 10.4
  Top Layer w0.254: C3.1 10.147,40.348 10.372,40.573 10.452,40.573 11.617,40.573 13.462,42.418 13.462,43.8 R1.1
NetC4_1: C4.1 R2.1 X1.1 | length 11.2
  Top Layer w0.254: C4.1 9.166,42.659 X1.1@10.452,41.373 ; R2.1 13.97,39.042 v1(13.97,40.64)
  Bottom Layer w0.254: X1.1@10.452,41.373 13.237,41.373 v1(13.97,40.64)
NetC5_2: C5.2 R3.2 X2.2 | length 8.5
  Top Layer w0.508: C5.2 8.774,33.312 9.098,32.989 X2.2 9.376,32.917 13.074,32.917 R3.2
NetC6_2: C6.2 R4.2 X2.1 | length 8.2
  Top Layer w0.508: C6.2 4.872,27.983 9.299,27.983 X2.1 9.314,27.979 13.059,27.979 R4.2
NetC7_2: C7.2 J3.5 SW1.3 SW1.4 U1.10 | length 53.8
  Top Layer w0.254: SW1.3 15.256,25.924 16.256,26.924 16.256,28.194 18.812,30.75 U1.10 23.638,30.75 v1(25.908,33.02) ; v1(35.56,37.338) 40.894,37.338 43.434,39.878 44.45,39.878 46.969,42.397 J3.5
  Top Layer w0.508: C7.2 9.392,20.06 10.578,21.246 SW1.4 SW1.3
  Bottom Layer w0.254: v1(25.908,33.02) 30.226,37.338 v1(35.56,37.338)
NetC8_1: C8.1 D1.2 VR1.3 | length 16.3
  Top Layer w0.508: v1(46.736,22.86) 46.78,22.816 46.78,20.452 VR1.3 46.885,20.348 46.885,16.307 D1.2
  Bottom Layer w0.508: C8.1 40.334,22.554 40.64,22.86 v1(46.736,22.86)
NetDIP1_13: DIP1.13 R19.2 U1.48 | length 28.4
  Top Layer w0.254: DIP1.13 10.02,53.023 22.244,40.798 U1.48@22.244,36.7
  Top Layer w0.508: R19.2 6.898,53.507 8.762,55.371 DIP1.13
NetDIP1_14: DIP1.14 R18.2 U1.47 | length 31
  Top Layer w0.254: DIP1.14 12.56,52.439 22.75,42.249 U1.47
  Top Layer w0.508: R18.2 7.076,55.463 8.742,57.129 10.802,57.129 10.806,57.125 11.294,57.125 12.56,55.859 DIP1.14
NetDIP1_15: DIP1.15 R17.2 U1.46 | length 32.8
  Top Layer w0.203: DIP1.15@15.062,55.333 DIP1.15
  Top Layer w0.254: DIP1.15@15.062,55.333 15.062,52.07 23.25,43.882 U1.46
  Top Layer w0.508: R17.2 7.609,57.419 8.357,58.166 12.792,58.166 15.1,55.859 DIP1.15
NetDIP1_16: DIP1.16 R16.2 U1.45 | length 35.7
  Top Layer w0.203: DIP1.16@17.602,55.408 DIP1.16 DIP1.16@17.678,55.332
  Top Layer w0.254: DIP1.16@17.678,55.332 17.678,51.765 23.75,45.694 U1.45
  Top Layer w0.508: R16.2 6.356,59.182 16.002,59.182 17.697,57.487 17.697,55.502 DIP1.16@17.602,55.408
NetDIP1_17: DIP1.17 R15.2 U1.44 | length 38.4
  Top Layer w0.254: DIP1.17@20.142,55.333 20.142,51.867 24.25,47.759 U1.44
  Top Layer w0.508: R15.2 7.395,61.381 8.578,60.198 17.907,60.198 20.142,57.963 DIP1.17@20.142,55.333
NetDIP1_18: DIP1.18 R14.2 U1.43 | length 41.3
  Top Layer w0.254: DIP1.18@22.657,55.308 22.657,52.375 24.75,50.282 U1.43
  Top Layer w0.508: R14.2 6.16,63.182 6.381,62.961 7.397,62.961 9.398,60.96 20.32,60.96 22.606,58.674 22.606,55.359 DIP1.18@22.657,55.308
NetDIP1_19: DIP1.19 R13.2 U1.42 | length 38.2
  Top Layer w0.203: DIP1.19@25.25,55.361 DIP1.19
  Top Layer w0.254: U1.42 DIP1.19@25.25,55.361
  Top Layer w0.508: DIP1.19 25.26,55.859 30.158,60.757 38.01,60.757 40.394,63.141 40.791,63.141 41.012,63.362 R13.2
NetDIP1_20: DIP1.20 R12.2 U1.41 | length 35.7
  Top Layer w0.203: DIP1.20@27.8,55.09 DIP1.20
  Top Layer w0.254: U1.41 25.75,50.286 26.568,51.105 26.568,53.859 DIP1.20@27.8,55.09
  Top Layer w0.508: DIP1.20 27.8,55.859 31.936,59.995 39.014,59.995 40.198,61.179 40.787,61.179 41.008,61.4 R12.2
NetDIP1_21: DIP1.21 R11.2 U1.40 | length 33.2
  Top Layer w0.203: DIP1.21@30.34,54.883 DIP1.21
  Top Layer w0.254: U1.40 26.25,49.288 28.219,51.257 28.219,52.762 DIP1.21@30.34,54.883
  Top Layer w0.508: DIP1.21 30.34,55.859 33.638,59.157 40.486,59.157 40.513,59.183 40.784,59.183 41.005,59.404 R11.2
NetDIP1_22: DIP1.22 R10.2 U1.39 | length 31.2
  Top Layer w0.203: 31.989,54.671 32.269,54.671 32.88,55.281 DIP1.22
  Top Layer w0.254: U1.39 26.75,47.857 29.388,50.495 29.388,52.07 31.989,54.671
  Top Layer w0.508: DIP1.22 32.88,55.859 35.314,58.293 39.345,58.293 39.776,57.861 40.937,57.861 R10.2@41.01,57.789
NetDIP1_23: DIP1.23 R9.2 U1.38 | length 29.7
  Top Layer w0.203: 27.25,40.716 27.28,40.716
  Top Layer w0.254: U1.38 27.25,40.716 ; 27.28,40.716 35.42,48.856 DIP1.23
  Top Layer w0.508: DIP1.23 35.42,55.859 36.998,57.437 38.651,57.437 39.966,56.122 40.789,56.122 41.01,55.901 R9.2
NetDIP1_24: DIP1.24 R8.2 U1.37 | length 26.5
  Top Layer w0.203: DIP1.24@37.96,54.649 DIP1.24@37.96,54.918
  Top Layer w0.254: U1.37 27.75,39.853 37.414,49.517 37.414,54.103 DIP1.24@37.96,54.649
  Top Layer w0.508: DIP1.24 37.96,54.918 39.055,53.823 40.874,53.823 R8.2
NetJ1_1: J1.1 R5.2 | length 3.4
  Top Layer w0.508: R5.2 42.372,31.897 45.45,31.897 J1.1
NetJ1_3: J1.3 R6.2 U1.22 | length 26
  Top Layer w0.254: U1.22 26.75,26.057 26.899,25.908 32.766,25.908 38.608,31.75 39.37,31.75 R6.2 39.449,32.845 42.605,36.001 J1.3
NetJ1_4: J1.4 R7.2 U1.23 | length 42.1
  Top Layer w0.254: U1.23 27.25,26.565 27.399,26.416 32.258,26.416 37.338,31.496 37.338,32.004 43.335,38.001 J1.4
  Top Layer w0.508: R7.2 47.654,48.358 48.768,47.244 48.768,41.215 46.275,38.721 46.275,38.413 45.863,38.001 J1.4
NetJ2_3: J2.3 U1.11 | length 25.4
  Top Layer w0.254: v1(16.764,26.162) 16.858,26.256 16.858,27.78 19.328,30.25 U1.11
  Bottom Layer w0.508: J2.3 5.634,15.032 v1(16.764,26.162)
NetJ2_4: J2.4 U1.12 | length 26.8
  Top Layer w0.254: v1(17.272,24.892) 17.272,25.043 17.78,25.551 17.78,27.909 19.621,29.75 U1.12
  Bottom Layer w0.508: J2.4 4.872,12.492 v1(17.272,24.892)
NetJ3_2: J3.2 U1.35 | length 17.1
  Top Layer w0.254: U1.35 30.178,34.75 34.798,39.37 v1(39.37,39.37)
  Bottom Layer w0.254: J3.2 39.359,44.352 39.359,39.381 v1(39.37,39.37)
NetJ3_4: J3.4 U1.36 | length 21.8
  Top Layer w0.254: U1.36 29.2,37.328 31.113,39.241 32.512,40.64 43.434,40.64 44.429,41.635 J3.4
NetP2_3: P2.3 U1.31 | length 36.6
  Top Layer w0.254: P2.3 20.447,4.466 20.447,8.509 25.4,13.462 v1(25.4,22.86) ; U1.31 29.216,32.766 v1(31.242,32.766)
  Bottom Layer w0.254: v1(25.4,22.86) 31.242,28.702 v1(31.242,32.766)
NetP2_4: P2.4 U1.28 | length 34
  Top Layer w0.254: P2.4 21.697,8.489 26.416,13.208 26.416,22.201 26.924,22.709 v1(26.924,22.86) ; U1.28 30.829,31.25 31.329,31.75 v1(32.512,31.75)
  Bottom Layer w0.254: v1(26.924,22.86) 26.924,23.622 32.512,29.21 v1(32.512,31.75)
NetP2_5: P2.5 U1.16 | length 26.7
  Top Layer w0.254: U1.16 23.75,22.986 24.384,22.352 v1(24.384,20.828) ; P2.5 22.991,4.462 22.991,8.513 v1(24.638,10.16)
  Bottom Layer w0.254: v1(24.384,20.828) 24.384,10.414 v1(24.638,10.16)
NetP2_6: P2.6 U1.34 | length 37.1
  Top Layer w0.254: P2.6 24.237,7.727 27.432,10.922 27.432,17.78 28.448,18.796 v1(28.448,22.86) ; U1.34 30.694,34.25 31.496,35.052 v1(32.766,35.052)
  Bottom Layer w0.254: v1(28.448,22.86) 28.448,24.13 33.274,28.956 33.274,34.372 32.766,34.88 v1(32.766,35.052)
NetP2_7: P2.7 U1.33 | length 39.6
  Top Layer w0.254: P2.7 25.552,4.44 25.552,7.772 28.194,10.414 28.194,17.018 29.972,18.796 v1(29.972,22.86) ; U1.33 33.75,33.75 33.972,33.528 v1(34.29,33.528)
  Bottom Layer w0.254: v1(29.972,22.86) 29.972,24.638 34.29,28.956 v1(34.29,33.528)
NetP2_8: P2.8 U1.27 | length 34.6
  Top Layer w0.254: P2.8 28.956,7.935 28.956,16.51 31.496,19.05 v1(31.496,22.86) ; U1.27 35.29,30.75 v1(35.298,30.742)
  Bottom Layer w0.254: v1(31.496,22.86) 31.496,24.892 35.298,28.694 v1(35.298,30.742)
NetP3_3: P3.3 U1.13 | length 30
  Top Layer w0.254: P3.3 9.088,4.283 22.25,17.446 U1.13
NetP3_4: P3.4 U1.14 | length 29.2
  Top Layer w0.254: P3.4 11.684,3.79 11.684,5.588 22.75,16.654 U1.14
NetP3_5: P3.5 U1.15 | length 28.3
  Top Layer w0.254: P3.5 14.168,7.056 23.25,16.138 U1.15
NetR1_2: R1.2 U1.2 | length 13.3
  Top Layer w0.254: R1.2 17.402,43.812 19.05,42.164 19.05,35.052 19.352,34.75 U1.2
NetR2_2: R2.2 U1.3 | length 8.7
  Top Layer w0.254: R2.2 17.428,38.96 18.415,37.973 18.415,34.925 19.09,34.25 U1.3
NetR3_1: R3.1 U1.8 | length 6.2
  Top Layer w0.254: R3.1 17.701,32.845 18.796,31.75 U1.8
NetR4_1: R4.1 U1.9 | length 7.2
  Top Layer w0.254: R4.1 14.969,28.028 15.317,28.376 15.676,28.376 18.55,31.25 U1.9
VCC: C1.2 C2.2 C9.2 C10.2 C11.1 J2.1 J3.1 P2.2 P3.1 R5.1 R6.1 R7.1 R8.1 R9.1 R10.1 R11.1 R12.1 R13.1 R14.1 R15.1 R16.1 R17.1 R18.1 R19.1 U1.6 VR1.2 VR1.4 | length 206.8
  Top Layer w0.203: R19.1@4.215,53.513 R19.1 ; R15.1 4.259,61.382 4.26,61.383 R14.1
  Top Layer w0.254: U1.6 20.823,32.773 23.423,32.773 v1(23.482,32.832)
  Top Layer w0.508: P3.1 4.008,4.283 0.762,7.529 0.762,19.468 1.06,19.766 2.285,19.766 J2.1 ; R19.1@4.215,53.513 4.217,53.516 4.217,55.46 R18.1 4.217,55.465 4.217,57.417 R17.1 4.228,57.429 4.228,59.39 R16.1 4.248,59.41 4.248,61.371 R15.1 ; R19.1 4.22,51.032 3.162,49.974 C1.2 ; R15.1@4.259,61.382 4.259,63.336 R14.1 ; C2.2 5.445,48.163 3.165,48.163 C1.2 ; C9.2 5.721,20.096 2.646,20.096 J2.1 ; J3.1 36.809,45.953 39.214,48.358 R7.1 41.199,48.404 41.199,50.419 42.915,52.135 R8.1 42.912,53.684 42.912,55.674 R9.1 R10.1 42.907,57.679 42.907,59.627 R11.1 42.906,59.631 42.906,61.604 R12.1 42.91,61.607 42.91,63.585 R13.1 ; v1(37.846,28.194) 39.326,28.194 39.624,28.492 39.624,29.596 R6.1 39.511,29.832 42.207,29.832 R5.1 42.418,29.744 42.418,27.914 43.925,26.408 VR1.4 VR1.2 44.45,20.333 44.45,18.203 43.899,17.653 43.899,16.551 C10.2 45.168,16.488 45.466,16.191 45.466,12.954 v1(42.672,10.16) ; J2.1 2.631,22.007 1.27,23.368 1.27,47.752 1.679,48.161 C1.2
  Bottom Layer w0.508: P3.1 4.008,4.283 5.48,5.756 P2.2 21.529,8.128 32.258,8.128 32.844,7.542 C11.1 35.438,6.228 39.37,10.16 v1(42.672,10.16) ; v1(23.482,32.832) 35.013,44.363 J3.1 36.809,29.231 v1(37.846,28.194)
pads on no net: U1.1 U1.4 U1.5 U1.17 U1.18 U1.19 U1.20 U1.21 U1.24 U1.25 U1.26 U1.29 U1.30 U1.32
copper on no net:
  other v2: 32.5,12.903 32.5,50.851

## Polygon pours and split planes (outlines as drawn)
VCC on Top Layer "VCC_L01_P000" (solid, pour order 0): 1.524,0 cw(c1.524,1.524) 0,1.524 0,63.5 cw(c1.524,63.5) 1.524,65.024 48.514,65.024 cw(c48.514,63.5) 50.038,63.5 50.038,1.524 cw(c48.514,1.524) 48.514,0
GND on Bottom Layer "GND_L02_P001" (solid, pour order 1): 1.524,0 cw(c1.524,1.524) 0,1.524 0,63.5 cw(c1.524,63.5) 1.524,65.024 48.514,65.024 cw(c48.514,63.5) 50.038,63.5 50.038,2.032 50.038,1.524 cw(c48.514,1.524) 48.514,0

## Silkscreen, mask and mechanical layers (free items; w line width, h text height)
Mechanical 1:
  the board outline again, w0.254